# Altium PCB PCB1.PcbDoc (part 1 of 2)
Units mm, origin at the board's own origin, x right, y up, seen from the top; angles counter-clockwise.
Board outline 119.6 x 179.6 mm, 2 copper layers (Top Layer, Bottom Layer); 69 components, 72 nets, 360 pads, 26 vias.
Unrouted connection lines stored in the file: 3.
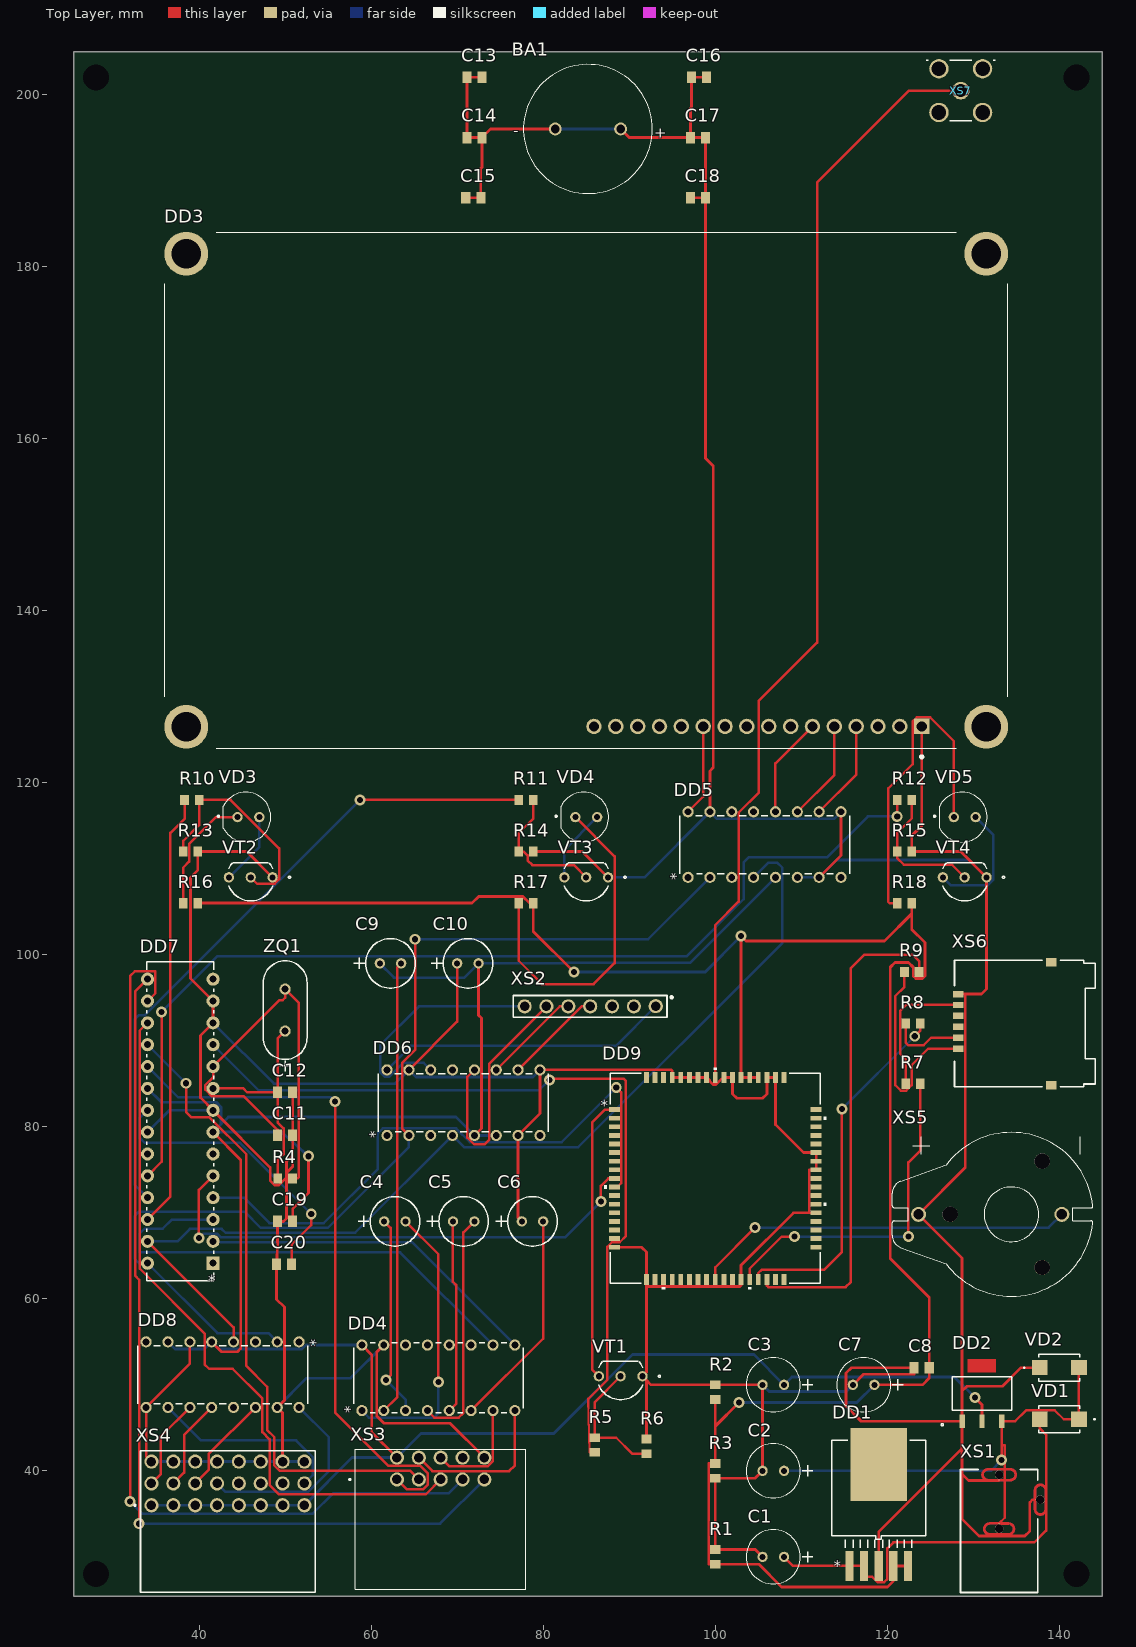
[diagram p0: Top Layer view]
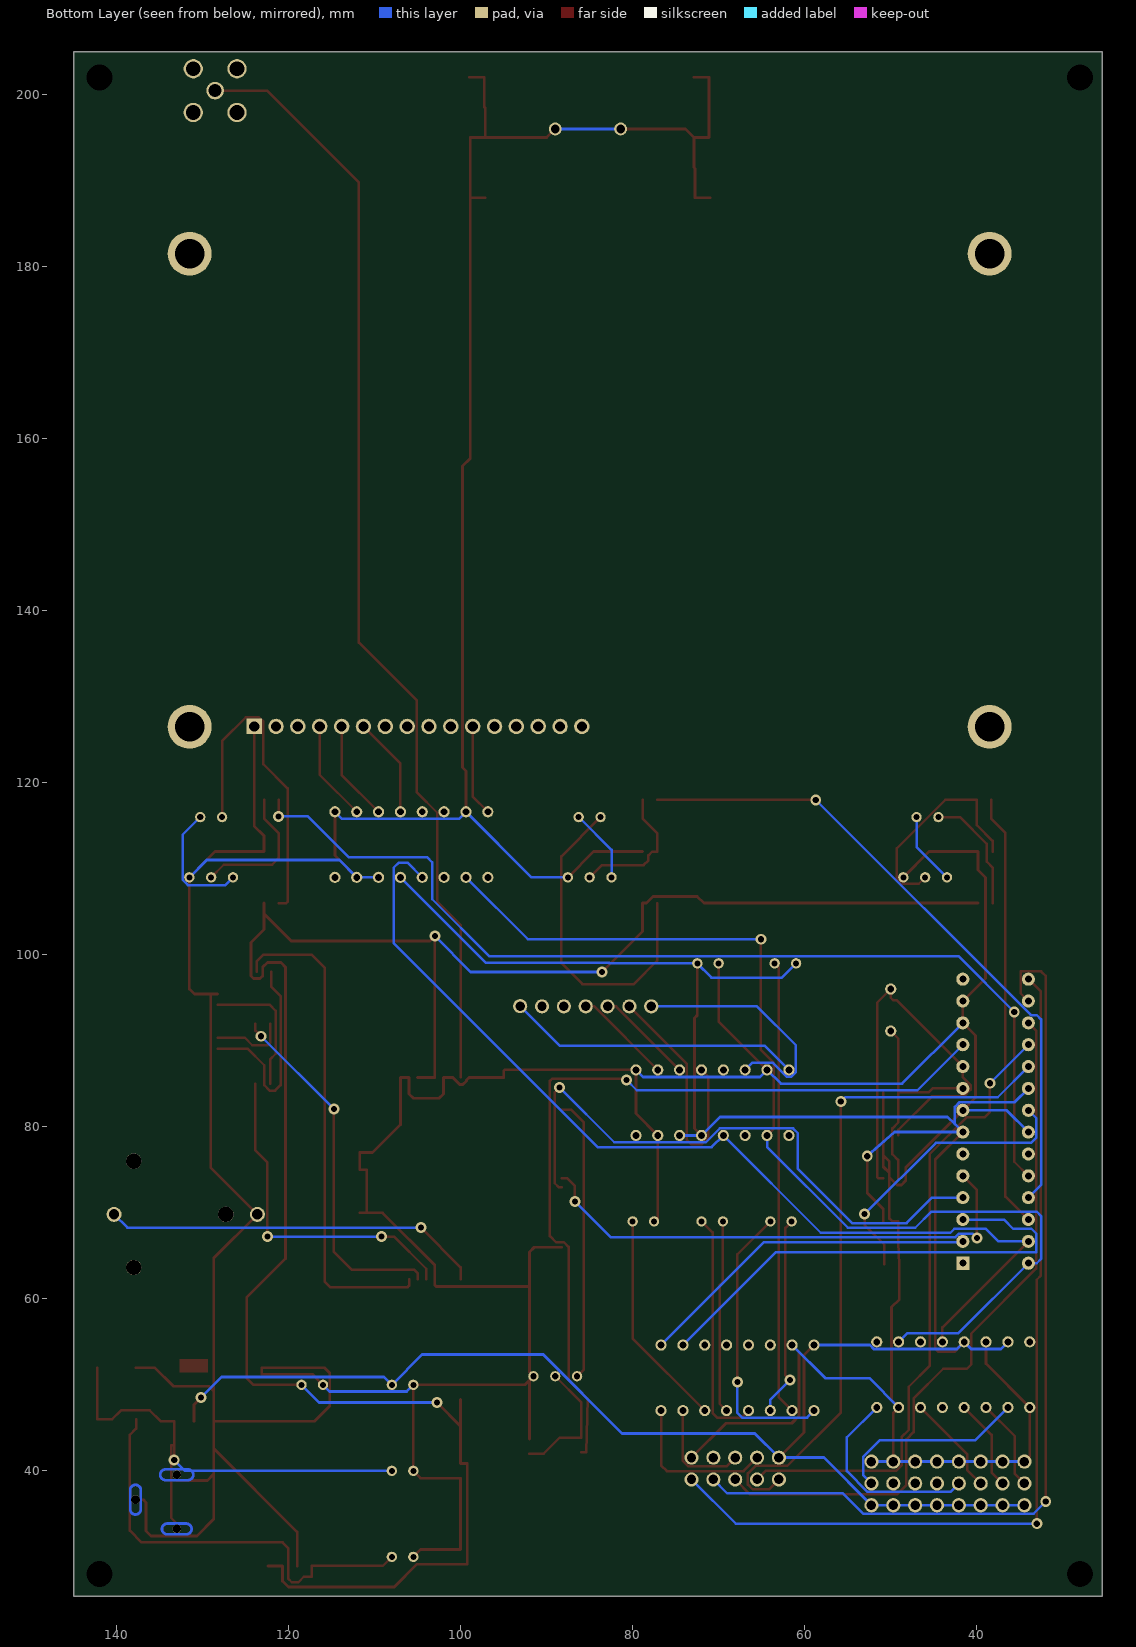
[diagram p1: Bottom Layer view, seen from below]
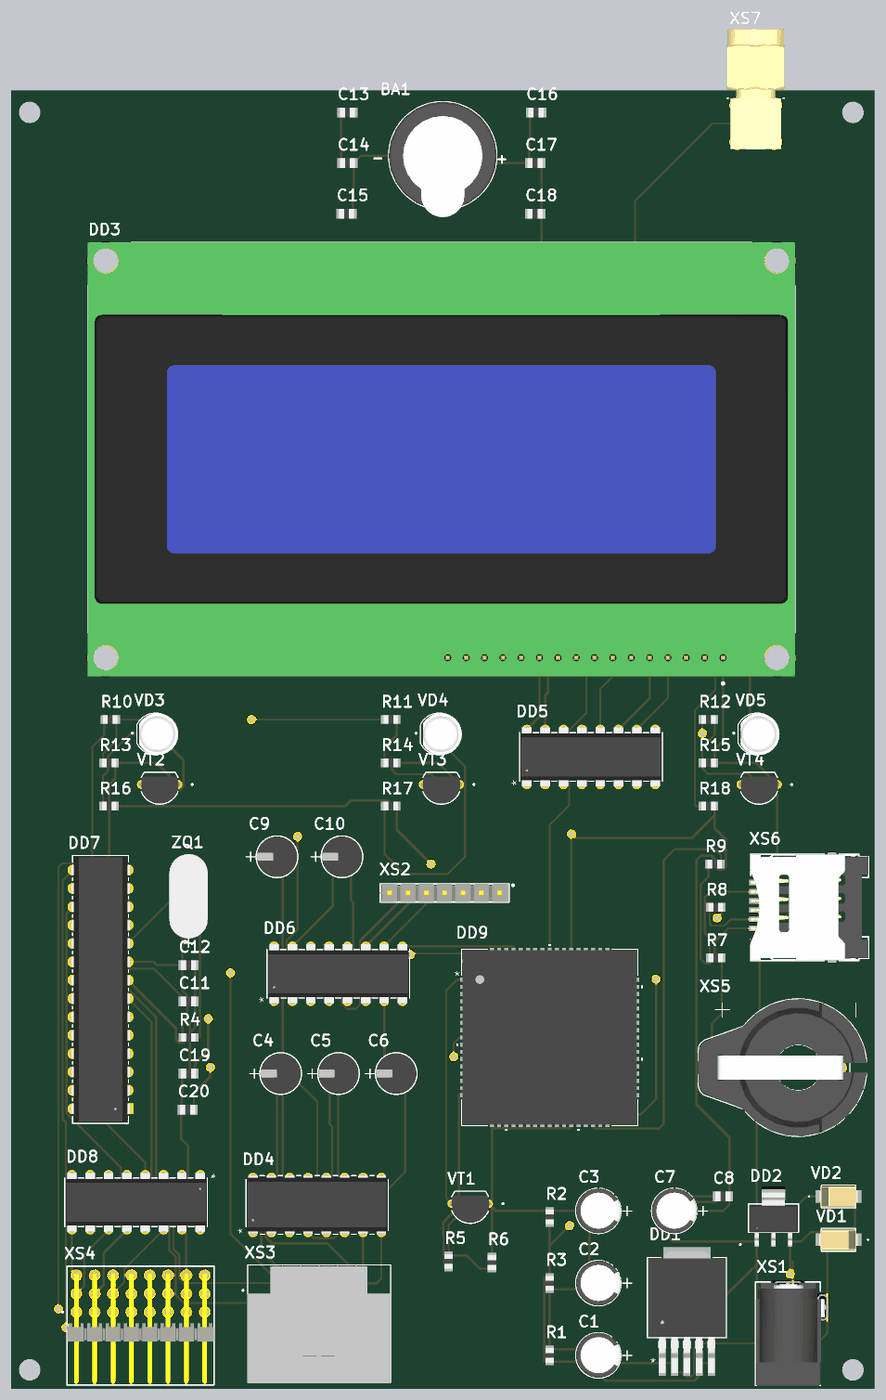
[diagram p3: 3D render of the assembled board from above, using the file's embedded part models]

## Layer stack, top to bottom
Top Solder: solder mask 0.0102, Solder Resist, Dk 3.5
Top Layer: signal copper 0.0356
Dielectric 1: dielectric 0.32, FR-4, Dk 4.8
Bottom Layer: signal copper 0.0356
Bottom Solder: solder mask 0.0102, Solder Resist, Dk 3.5

## Board outline
25.4,25.4 145,25.4 145,205 25.4,205

## Design rules (kind name [scope] priority, off if disabled: settings)
Clearance [All] p1: gap=0.254 ignorepadtopadclearanceinfootprint=FALSE except(0: Arc-SMDPad Arc-THPad Arc-Hole Track-SMDPad Track-THPad Track-Hole SMDPad-THPad SMDPad-Hole THPad-Fill THPad-Poly THPad-Region Fill-Hole Poly-Hole Region-Hole)
PolygonConnect [All] p1: connectstyle=Relief reliefconductorwidth=0.254 reliefentries=4 polygonreliefangle="90 Angle" airgapwidth=0.254
RoutingVias [All] p1: holewidth=0.711 width=1.27 viastyle="Through Hole" minholewidth=0.711 minwidth=1.27 maxholewidth=0.711 maxwidth=1.27
SolderMaskExpansion [All] p1: expansion=0.102
Width signal [InNetClass('signal')] p1: maxlimit=0.29 minlimit=0.262 preferedwidth=0.29
Width power [InNetClass('power')] p2: maxlimit=0.323 minlimit=0.29 preferedwidth=0.323
30 further rules are at their usual default settings.

## Classes and differential pairs
net class signal: NetC1_2 NetC2_2 NetC4_1 NetC4_2 NetC5_1 NetC5_2 NetC6_2 NetC9_2 NetC11_1 NetC12_1 NetC20_2 NetDD3_4 NetDD3_5 NetDD3_6 NetDD3_11 NetDD3_12 NetDD3_13 NetDD3_14 NetDD4_7 NetDD4_8 NetDD4_9 NetDD4_10 NetDD5_2 NetDD5_4 NetDD6_10 NetDD6_11 NetDD6_12 NetDD6_14 NetDD6_16 NetDD6_17 NetDD6_19 NetDD7_4 NetDD7_5 NetDD7_11 NetDD7_15 NetDD7_16 NetDD7_17 NetDD7_18 NetDD7_19 NetDD7_24 NetDD7_25 NetDD7_26 NetDD8_10 NetDD8_11 NetDD8_12 NetDD8_14 NetDD8_16 NetDD8_17 NetDD8_19 NetDD8_20 NetDD9_1 NetDD9_26 NetDD9_30 NetDD9_31 NetDD9_32 NetDD9_60 NetR5_2 NetR7_1 NetR8_1 NetR9_1 NetR10_2 NetR11_2 NetR12_2 NetR16_1 NetR17_1 NetR18_1 NetVD3_2 NetVD4_2 NetVD5_2
net class power: +5 GND VBAT
component class main: BA1 C1 C2 C3 C4 C5 C6 C7 C8 C9 C10 C11 C12 C13 C14 C15 C16 C17 C18 C19 C20 DD1 DD2 DD3 DD4 DD5 DD6 DD7 DD8 DD9 R1 R2 R3 R4 R5 R6 R7 R8 R9 R10 R11 R12 R13 R14 R15 R16 R17 R18 VD1 VD2 VD3 VD4 VD5 VT1 VT2 VT3 VT4 XS1 XS2 XS3 XS4 XS5 XS6 XS7 ZQ1

## Components (designator, comment, footprint, x,y, rotation, side; value= is the part's Value field where it differs from the comment)
BA1 "speaker_CVS-1508" SPeaKeR_CVS-1508 85.2,196 r180 top
C1 "pol_10mkF" PCAP_6_3x11THRU-ELECT_NCA 105.5,30 r0 top
C2 "pol_10mkF" PCAP_6_3x11THRU-ELECT_NCA 105.5,40 r0 top
C3 "pol_10mkF" PCAP_6_3x11THRU-ELECT_NCA 105.5,50 r0 top
C4 "pol_1mkF" PCAP_5x11-THRU-ELECT_NCA 61.511,69 r0 top
C5 "pol_1mkF" PCAP_5x11-THRU-ELECT_NCA 69.511,69 r0 top
C6 "pol_1mkF" PCAP_5x11-THRU-ELECT_NCA 77.511,69 r0 top
C7 "pol_10mkF" PCAP_6_3x11THRU-ELECT_NCA 116,50 r0 top
C8 "cap_100nF" CAP_0805_GRM 124,52 r0 top
C9 "pol_1mkF" PCAP_5x11-THRU-ELECT_NCA 61,99 r0 top
C10 "pol_1mkF" PCAP_5x11-THRU-ELECT_NCA 70,99 r0 top
C11 "33pF" CAP_0805_GRM 50,79 r0 top
C12 "33pF" CAP_0805_GRM 50,84 r0 top
C13 "cap_33pF" CAP_0805_GRM 72,202 r0 top
C14 "cap_33pF" CAP_0805_GRM 72,195 r0 top
C15 "cap_33pF" CAP_0805_GRM 71.874,188 r0 top
C16 "cap_33pF" CAP_0805_GRM 98.126,202 r0 top
C17 "cap_33pF" CAP_0805_GRM 98,195 r0 top
C18 "cap_33pF" CAP_0805_GRM 98,188 r0 top
C19 "33pF" CAP_0805_GRM 50,69 r0 top
C20 "33pF" CAP_0805_GRM 49.874,64 r0 top
DD1 "stu_MIC29302WT" TO-263-5_MCH 119,38 r0 top
DD2 "NCP1117ST50T3G" SOT223-3_ONS 131,49 r0 top
DD3 "LCD-20X4B" LCD_LCD-20X4B 85,154 r180 top
DD4 "MAX232CSE+" max232_dip16 58.92,47 r90 top
DD5 "PCF8574DGVR" SOT38-4_NXP 96.84,109 r90 top
DD6 "PCF8574DGVR" SOT38-4_NXP 61.84,79 r90 top
DD7 "ATMEGA328P-PU" 28P3_ATM 41.62,64.14 r180 top
DD8 "PCF8574DGVR" SOT38-4_NXP 51.62,55 r270 top
DD9 "SIM900A" SIM800A_SMM 100,74 r0 top
Designator1 "Comment" "BOASVIEWlayer:Top Layer:2:1:1:1" 83,2088 r0 top
Designator1 "Comment" "BOASVIEWlayer:Top Overlay:2:1:33:1" 83,2088 r0 top
Designator1 "Comment" "BOASVIEWside:Вид платы слева:2:0:0:0" 390,2447 r0 top
Designator1 "Comment" "BOASVIEWlayer:Bottom Layer:2:-1:32:1" 469,2446 r0 top
R1 "res_510" RC0805N_YAG 100,30 r270 top
R2 "res_510" RC0805N_YAG 100,49.152 r270 top
R3 "res_510" RC0805N_YAG 100,40 r90 top
R4 "res_1M" RC0805N_YAG 50,74 r0 top
R5 "res_4.7k" RC0805N_YAG 86,43 r90 top
R6 "res_4.7k" RC0805N_YAG 92,42.848 r90 top
R7 "res_4.7k" RC0805N_YAG 123,85 r0 top
R8 "res_4.7k" RC0805N_YAG 123,92 r0 top
R9 "res_4.7k" RC0805N_YAG 122.848,98 r0 top
R10 "res_4.7k" RC0805N_YAG 39.152,118 r0 top
R11 "res_4.7k" RC0805N_YAG 78,118 r0 top
R12 "res_4.7k" RC0805N_YAG 122,118 r0 top
R13 "res_4.7k" RC0805N_YAG 39,112 r0 top
R14 "res_4.7k" RC0805N_YAG 78,112 r0 top
R15 "res_4.7k" RC0805N_YAG 122,112 r0 top
R16 "res_510" RC0805N_YAG 39,106 r0 top
R17 "res_510" RC0805N_YAG 78,106 r0 top
R18 "res_510" RC0805N_YAG 122,106 r0 top
VD1 "diode_M7" M7_DO-214AC_DTC 140,46 r180 top
VD2 "diode_M7" M7_DO-214AC_DTC 140,52 r0 top
VD3 "diode_red" LED_151054RS03000 45.73,116 r0 top
VD4 "diode_yellow" LED_151054RS03000 85,116 r0 top
VD5 "diode_green" LED_151054RS03000 129,116 r0 top
VT1 "BC547A" TO-92-3_ONS 91.54,51 r180 top
VT2 "BC547A" TO-92-3_ONS 48.54,109 r180 top
VT3 "BC547A" TO-92-3_ONS 87.54,109 r180 top
VT4 "BC547A" TO-92-3_ONS 131.54,109 r180 top
XS1 "DCJ200-10" conn_DCJ200-10 133,33 r0 top
XS2 "conn_Keypad" conn_7pin_TSW-107-05-G-D 85.46,94 r180 top
XS3 "BH-10" conn_10pin_TE_5-102570-3 63,39 r0 top
XS4 "ds1013" conn_24pin_TSW-108-08-T-T 34.46,36 r0 top
XS5 "conn_Battery_CR2032" conn_BAT_BH600 134.432,69.821 r270 top
XS6 "SIM7200-6-0-18-00-X_REVA" CONN_SIM7200-6-0-18-00-X_REVA 136,92 r270 top
XS7 "antenn_RECE.20279.001E.01" conn_antenn_901-9894-RFX 128.54,200.46 r0 top
ZQ1 "HC-49S" CRYSTAL_HC49S_MTC 50,91.12 r90 top

## Footprints (in the part's own frame and the unit in brackets; to place one, negate y for a bottom-side part, rotate by r counter-clockwise, add the part's x,y. Pads: shape width x height; smd on the part's side, far side on the other; paste and mask are expansions set on the pad)
28P3_ATM [mil]
  rect 60x60 hole 32 mask+0: 1(0,0)
  round 60 hole 32 mask+0: 2(0,-100) 3(0,-200) 4(0,-300) 5(0,-400) 6(0,-500) 7(0,-600) 8(0,-700) 9(0,-800) 10(0,-900) 11(0,-1000) 12(0,-1100) 13(0,-1200) 14(0,-1300) 15(300,-1300) 16(300,-1200) 17(300,-1100) 18(300,-1000) 19(300,-900) 20(300,-800) 21(300,-700) 22(300,-600) 23(300,-500) 24(300,-400) 25(300,-300) 26(300,-200) 27(300,-100) 28(300,0)
  silkscreen extent -2,-1380 303,80, body extent -10,-1374 309,76, height 205
"BOASVIEWlayer:Bottom Layer:2:-1:32:1" [mm]
"BOASVIEWlayer:Top Layer:2:1:1:1" [mm]
"BOASVIEWlayer:Top Overlay:2:1:33:1" [mm]
"BOASVIEWside:Вид платы слева:2:0:0:0" [mm]
CAP_0805_GRM [mil]
  rect 41.78x53 smd paste+0 mask+0: 1(-34.39,0) 2(34.39,0)
  body extent -41,-26 42,27, height 53
conn_7pin_TSW-107-05-G-D [mm] "2.54mm pitch, 7 pin, terminal strip; straight, single row"
  round 1.65 hole 1.1 mask+0: 1(-7.62,-0.025) 2(-5.08,0) 3(-2.54,0) 4(0,0) 5(2.54,0) 6(5.08,0) 7(7.62,0)
  silkscreen extent -9.59,-1.25 8.93,1.25, body extent -8.89,-1.27 9.02,1.27, height 5.21
conn_10pin_TE_5-102570-3 [mm]
  round 1.65 hole 1.1: 1(0,0) 2(0,2.54) 3(2.54,0) 4(2.54,2.54) 5(5.08,0) 6(5.08,2.54) 7(7.62,0) 8(7.62,2.54) 9(10.16,0) 10(10.16,2.54)
  silkscreen extent -5.58,-12.74 14.99,3.49, body extent -4.86,-12.88 14.96,3.35, height 11.08
conn_24pin_TSW-108-08-T-T [mm]
  round 1.65 hole 1.1: 1(0,0) 2(0,2.54) 3(0,5.08) 4(2.54,0) 5(2.54,2.54) 6(2.54,5.08) 7(5.08,0) 8(5.08,2.54) 9(5.08,5.08) 10(7.62,0) 11(7.62,2.54) 12(7.62,5.08) 13(10.16,0) 14(10.16,2.54) 15(10.16,5.08) 16(12.7,0) 17(12.7,2.54) 18(12.7,5.08) 19(15.24,0) 20(15.24,2.54) 21(15.24,5.08) 22(17.78,0) 23(17.78,2.54) 24(17.78,5.08)
  silkscreen extent -2.02,-10.1 19.05,6.35, body extent -1.27,-9.94 19.05,5.37, height 7.81
conn_antenn_901-9894-RFX [mm]
  round 2.05 hole 1.5: 1(0,0)
  round 2.25 hole 1.7: 2(-2.54,2.54) 3(-2.54,-2.54) 4(2.54,-2.54) 5(2.54,2.54)
  silkscreen extent -3.99,-3.51 3.99,3.51, body extent -4,-3.5 4,13.1, height 10.98
conn_BAT_BH600 [mm]
  round 1.75 hole 1.2: 1(0,5.86) 2(0,-10.8)
  round 1.8 hole 1.8 unplated: ""(-6.179,3.567) ""(0,-7.135) ""(6.179,3.567)
  silkscreen extent -9.53,-13.84 9.53,9.48, body extent -9.52,-13.84 9.52,9.5, height 7.34
conn_DCJ200-10 [mm]
  rect 0.1x0.1 smd paste-1 mask+0: 1(0,5.95) 2(0,0.9) 3(4.2,3.65)
  round 1 hole 1: ""(0,0.25) ""(0,6.55) ""(4.8,3.65)
  Top Layer region: 0,0.75 -1.1,0.75 -1.126,0.749 -1.152,0.747 -1.178,0.744 -1.204,0.739 -1.229,0.733 -1.255,0.726 -1.279,0.717 -1.303,0.707 -1.327,0.696 -1.35,0.683 -1.372,0.669 -1.394,0.655 -1.415,0.639 -1.435,0.622 -1.454,0.604 -1.472,0.585 -1.489,0.565 -1.505,0.544 -1.519,0.522 -1.533,0.5 -1.546,0.477 -1.557,0.453 -1.567,0.429 -1.576,0.405 -1.583,0.379 -1.589,0.354 -1.594,0.328 -1.597,0.302 -1.599,0.276 -1.6,0.25 -1.599,0.224 -1.597,0.198 -1.594,0.172 -1.589,0.146 -1.583,0.121 -1.576,0.095 -1.567,0.071 -1.557,0.047 -1.546,0.023 -1.533,0 -1.519,-0.022 -1.505,-0.044 -1.489,-0.065 -1.472,-0.085 -1.454,-0.104 -1.435,-0.122 -1.415,-0.139 -1.394,-0.155 -1.372,-0.169 -1.35,-0.183 -1.327,-0.196 -1.303,-0.207 -1.279,-0.217 -1.255,-0.226 -1.229,-0.233 -1.204,-0.239 -1.178,-0.244 -1.152,-0.247 -1.126,-0.249 -1.1,-0.25 0,-0.25 0,-0.5 -1.1,-0.5 -1.139,-0.499 -1.178,-0.496 -1.217,-0.491 -1.256,-0.484 -1.294,-0.474 -1.332,-0.463 -1.369,-0.45 -1.405,-0.435 -1.44,-0.418 -1.475,-0.4 -1.508,-0.379 -1.541,-0.357 -1.572,-0.333 -1.602,-0.307 -1.63,-0.28 -1.657,-0.252 -1.683,-0.222 -1.707,-0.191 -1.729,-0.158 -1.75,-0.125 -1.768,-0.09 -1.785,-0.055 -1.8,-0.019 -1.813,0.018 -1.824,0.056 -1.834,0.094 -1.841,0.133 -1.846,0.172 -1.849,0.211 -1.85,0.25 -1.849,0.289 -1.846,0.328 -1.841,0.367 -1.834,0.406 -1.824,0.444 -1.813,0.482 -1.8,0.519 -1.785,0.555 -1.768,0.59 -1.75,0.625 -1.729,0.658 -1.707,0.691 -1.683,0.722 -1.657,0.752 -1.63,0.78 -1.602,0.807 -1.572,0.833 -1.541,0.857 -1.508,0.879 -1.475,0.9 -1.44,0.918 -1.405,0.935 -1.369,0.95 -1.332,0.963 -1.294,0.974 -1.256,0.984 -1.217,0.991 -1.178,0.996 -1.139,0.999 -1.1,1 0,1
  Top Layer region: 1.139,0.999 1.178,0.996 1.217,0.991 1.256,0.984 1.294,0.974 1.332,0.963 1.369,0.95 1.405,0.935 1.44,0.918 1.475,0.9 1.508,0.879 1.541,0.857 1.572,0.833 1.602,0.807 1.63,0.78 1.657,0.752 1.683,0.722 1.707,0.691 1.729,0.658 1.75,0.625 1.768,0.59 1.785,0.555 1.8,0.519 1.813,0.482 1.824,0.444 1.834,0.406 1.841,0.367 1.846,0.328 1.849,0.289 1.85,0.25 1.849,0.211 1.846,0.172 1.841,0.133 1.834,0.094 1.824,0.056 1.813,0.018 1.8,-0.019 1.785,-0.055 1.768,-0.09 1.75,-0.125 1.729,-0.158 1.707,-0.191 1.683,-0.222 1.657,-0.252 1.63,-0.28 1.602,-0.307 1.572,-0.333 1.541,-0.357 1.508,-0.379 1.475,-0.4 1.44,-0.418 1.405,-0.435 1.369,-0.45 1.332,-0.463 1.294,-0.474 1.256,-0.484 1.217,-0.491 1.178,-0.496 1.139,-0.499 1.1,-0.5 0,-0.5 0,-0.25 1.1,-0.25 1.126,-0.249 1.152,-0.247 1.178,-0.244 1.204,-0.239 1.229,-0.233 1.255,-0.226 1.279,-0.217 1.303,-0.207 1.327,-0.196 1.35,-0.183 1.372,-0.169 1.394,-0.155 1.415,-0.139 1.435,-0.122 1.454,-0.104 1.472,-0.085 1.489,-0.065 1.505,-0.044 1.519,-0.022 1.533,0 1.546,0.023 1.557,0.047 1.567,0.071 1.576,0.095 1.583,0.121 1.589,0.146 1.594,0.172 1.597,0.198 1.599,0.224 1.6,0.25 1.599,0.276 1.597,0.302 1.594,0.328 1.589,0.354 1.583,0.379 1.576,0.405 1.567,0.429 1.557,0.453 1.546,0.477 1.533,0.5 1.519,0.522 1.505,0.544 1.489,0.565 1.472,0.585 1.454,0.604 1.435,0.622 1.415,0.639 1.394,0.655 1.372,0.669 1.35,0.683 1.327,0.696 1.303,0.707 1.279,0.717 1.255,0.726 1.229,0.733 1.204,0.739 1.178,0.744 1.152,0.747 1.126,0.749 1.1,0.75 0,0.75 0,1 1.1,1
  Top Layer region: 5.55,2.55 5.549,2.511 5.546,2.472 5.541,2.433 5.534,2.394 5.524,2.356 5.513,2.318 5.5,2.281 5.485,2.245 5.468,2.21 5.45,2.175 5.429,2.142 5.407,2.109 5.383,2.078 5.357,2.048 5.33,2.02 5.302,1.993 5.272,1.967 5.241,1.943 5.208,1.921 5.175,1.9 5.14,1.882 5.105,1.865 5.069,1.85 5.032,1.837 4.994,1.826 4.956,1.816 4.917,1.809 4.878,1.804 4.839,1.801 4.8,1.8 4.761,1.801 4.722,1.804 4.683,1.809 4.644,1.816 4.606,1.826 4.568,1.837 4.531,1.85 4.495,1.865 4.46,1.882 4.425,1.9 4.392,1.921 4.359,1.943 4.328,1.967 4.298,1.993 4.27,2.02 4.243,2.048 4.217,2.078 4.193,2.109 4.171,2.142 4.15,2.175 4.132,2.21 4.115,2.245 4.1,2.281 4.087,2.318 4.076,2.356 4.066,2.394 4.059,2.433 4.054,2.472 4.051,2.511 4.05,2.55 4.05,3.65 4.3,3.65 4.3,2.55 4.301,2.524 4.303,2.498 4.306,2.472 4.311,2.446 4.317,2.421 4.324,2.395 4.333,2.371 4.343,2.347 4.354,2.323 4.367,2.3 4.381,2.278 4.395,2.256 4.411,2.235 4.428,2.215 4.446,2.196 4.465,2.178 4.485,2.161 4.506,2.145 4.528,2.131 4.55,2.117 4.573,2.104 4.597,2.093 4.621,2.083 4.645,2.074 4.671,2.067 4.696,2.061 4.722,2.056 4.748,2.053 4.774,2.051 4.8,2.05 4.826,2.051 4.852,2.053 4.878,2.056 4.904,2.061 4.929,2.067 4.955,2.074 4.979,2.083 5.003,2.093 5.027,2.104 5.05,2.117 5.072,2.131 5.094,2.145 5.115,2.161 5.135,2.178 5.154,2.196 5.172,2.215 5.189,2.235 5.205,2.256 5.219,2.278 5.233,2.3 5.246,2.323 5.257,2.347 5.267,2.371 5.276,2.395 5.283,2.421 5.289,2.446 5.294,2.472 5.297,2.498 5.299,2.524 5.3,2.55 5.3,3.65 5.55,3.65
  Top Layer region: 4.839,5.499 4.878,5.496 4.917,5.491 4.956,5.484 4.994,5.474 5.032,5.463 5.069,5.45 5.105,5.435 5.14,5.418 5.175,5.4 5.208,5.379 5.241,5.357 5.272,5.333 5.302,5.307 5.33,5.28 5.357,5.252 5.383,5.222 5.407,5.191 5.429,5.158 5.45,5.125 5.468,5.09 5.485,5.055 5.5,5.019 5.513,4.982 5.524,4.944 5.534,4.906 5.541,4.867 5.546,4.828 5.549,4.789 5.55,4.75 5.55,3.65 5.3,3.65 5.3,4.75 5.299,4.776 5.297,4.802 5.294,4.828 5.289,4.854 5.283,4.879 5.276,4.905 5.267,4.929 5.257,4.953 5.246,4.977 5.233,5 5.219,5.022 5.205,5.044 5.189,5.065 5.172,5.085 5.154,5.104 5.135,5.122 5.115,5.139 5.094,5.155 5.072,5.169 5.05,5.183 5.027,5.196 5.003,5.207 4.979,5.217 4.955,5.226 4.929,5.233 4.904,5.239 4.878,5.244 4.852,5.247 4.826,5.249 4.8,5.25 4.774,5.249 4.748,5.247 4.722,5.244 4.696,5.239 4.671,5.233 4.645,5.226 4.621,5.217 4.597,5.207 4.573,5.196 4.55,5.183 4.528,5.169 4.506,5.155 4.485,5.139 4.465,5.122 4.446,5.104 4.428,5.085 4.411,5.065 4.395,5.044 4.381,5.022 4.367,5 4.354,4.977 4.343,4.953 4.333,4.929 4.324,4.905 4.317,4.879 4.311,4.854 4.306,4.828 4.303,4.802 4.301,4.776 4.3,4.75 4.3,3.65 4.05,3.65 4.05,4.75 4.051,4.789 4.054,4.828 4.059,4.867 4.066,4.906 4.076,4.944 4.087,4.982 4.1,5.019 4.115,5.055 4.132,5.09 4.15,5.125 4.171,5.158 4.193,5.191 4.217,5.222 4.243,5.252 4.27,5.28 4.298,5.307 4.328,5.333 4.359,5.357 4.392,5.379 4.425,5.4 4.46,5.418 4.495,5.435 4.531,5.45 4.568,5.463 4.606,5.474 4.644,5.484 4.683,5.491 4.722,5.496 4.761,5.499 4.8,5.5
  Top Layer region: 0,7.05 -1.3,7.05 -1.326,7.049 -1.352,7.047 -1.378,7.044 -1.404,7.039 -1.429,7.033 -1.455,7.026 -1.479,7.017 -1.503,7.007 -1.527,6.996 -1.55,6.983 -1.572,6.969 -1.594,6.955 -1.615,6.939 -1.635,6.922 -1.654,6.904 -1.672,6.885 -1.689,6.865 -1.705,6.844 -1.719,6.822 -1.733,6.8 -1.746,6.777 -1.757,6.753 -1.767,6.729 -1.776,6.705 -1.783,6.679 -1.789,6.654 -1.794,6.628 -1.797,6.602 -1.799,6.576 -1.8,6.55 -1.799,6.524 -1.797,6.498 -1.794,6.472 -1.789,6.446 -1.783,6.421 -1.776,6.395 -1.767,6.371 -1.757,6.347 -1.746,6.323 -1.733,6.3 -1.719,6.278 -1.705,6.256 -1.689,6.235 -1.672,6.215 -1.654,6.196 -1.635,6.178 -1.615,6.161 -1.594,6.145 -1.572,6.131 -1.55,6.117 -1.527,6.104 -1.503,6.093 -1.479,6.083 -1.455,6.074 -1.429,6.067 -1.404,6.061 -1.378,6.056 -1.352,6.053 -1.326,6.051 -1.3,6.05 0,6.05 0,5.8 -1.3,5.8 -1.339,5.801 -1.378,5.804 -1.417,5.809 -1.456,5.816 -1.494,5.826 -1.532,5.837 -1.569,5.85 -1.605,5.865 -1.64,5.882 -1.675,5.9 -1.708,5.921 -1.741,5.943 -1.772,5.967 -1.802,5.993 -1.83,6.02 -1.857,6.048 -1.883,6.078 -1.907,6.109 -1.929,6.142 -1.95,6.175 -1.968,6.21 -1.985,6.245 -2,6.281 -2.013,6.318 -2.024,6.356 -2.034,6.394 -2.041,6.433 -2.046,6.472 -2.049,6.511 -2.05,6.55 -2.049,6.589 -2.046,6.628 -2.041,6.667 -2.034,6.706 -2.024,6.744 -2.013,6.782 -2,6.819 -1.985,6.855 -1.968,6.89 -1.95,6.925 -1.929,6.958 -1.907,6.991 -1.883,7.022 -1.857,7.052 -1.83,7.08 -1.802,7.107 -1.772,7.133 -1.741,7.157 -1.708,7.179 -1.675,7.2 -1.64,7.218 -1.605,7.235 -1.569,7.25 -1.532,7.263 -1.494,7.274 -1.456,7.284 -1.417,7.291 -1.378,7.296 -1.339,7.299 -1.3,7.3 0,7.3
  Top Layer region: 1.339,7.299 1.378,7.296 1.417,7.291 1.456,7.284 1.494,7.274 1.532,7.263 1.569,7.25 1.605,7.235 1.64,7.218 1.675,7.2 1.708,7.179 1.741,7.157 1.772,7.133 1.802,7.107 1.83,7.08 1.857,7.052 1.883,7.022 1.907,6.991 1.929,6.958 1.95,6.925 1.968,6.89 1.985,6.855 2,6.819 2.013,6.782 2.024,6.744 2.034,6.706 2.041,6.667 2.046,6.628 2.049,6.589 2.05,6.55 2.049,6.511 2.046,6.472 2.041,6.433 2.034,6.394 2.024,6.356 2.013,6.318 2,6.281 1.985,6.245 1.968,6.21 1.95,6.175 1.929,6.142 1.907,6.109 1.883,6.078 1.857,6.048 1.83,6.02 1.802,5.993 1.772,5.967 1.741,5.943 1.708,5.921 1.675,5.9 1.64,5.882 1.605,5.865 1.569,5.85 1.532,5.837 1.494,5.826 1.456,5.816 1.417,5.809 1.378,5.804 1.339,5.801 1.3,5.8 0,5.8 0,6.05 1.3,6.05 1.326,6.051 1.352,6.053 1.378,6.056 1.404,6.061 1.429,6.067 1.455,6.074 1.479,6.083 1.503,6.093 1.527,6.104 1.55,6.117 1.572,6.131 1.594,6.145 1.615,6.161 1.635,6.178 1.654,6.196 1.672,6.215 1.689,6.235 1.705,6.256 1.719,6.278 1.733,6.3 1.746,6.323 1.757,6.347 1.767,6.371 1.776,6.395 1.783,6.421 1.789,6.446 1.794,6.472 1.797,6.498 1.799,6.524 1.8,6.55 1.799,6.576 1.797,6.602 1.794,6.628 1.789,6.654 1.783,6.679 1.776,6.705 1.767,6.729 1.757,6.753 1.746,6.777 1.733,6.8 1.719,6.822 1.705,6.844 1.689,6.865 1.672,6.885 1.654,6.904 1.635,6.922 1.615,6.939 1.594,6.955 1.572,6.969 1.55,6.983 1.527,6.996 1.503,7.007 1.479,7.017 1.455,7.026 1.429,7.033 1.404,7.039 1.378,7.044 1.352,7.047 1.326,7.049 1.3,7.05 0,7.05 0,7.3 1.3,7.3
  Bottom Layer region: 0,0.75 -1.1,0.75 -1.126,0.749 -1.152,0.747 -1.178,0.744 -1.204,0.739 -1.229,0.733 -1.255,0.726 -1.279,0.717 -1.303,0.707 -1.327,0.696 -1.35,0.683 -1.372,0.669 -1.394,0.655 -1.415,0.639 -1.435,0.622 -1.454,0.604 -1.472,0.585 -1.489,0.565 -1.505,0.544 -1.519,0.522 -1.533,0.5 -1.546,0.477 -1.557,0.453 -1.567,0.429 -1.576,0.405 -1.583,0.379 -1.589,0.354 -1.594,0.328 -1.597,0.302 -1.599,0.276 -1.6,0.25 -1.599,0.224 -1.597,0.198 -1.594,0.172 -1.589,0.146 -1.583,0.121 -1.576,0.095 -1.567,0.071 -1.557,0.047 -1.546,0.023 -1.533,0 -1.519,-0.022 -1.505,-0.044 -1.489,-0.065 -1.472,-0.085 -1.454,-0.104 -1.435,-0.122 -1.415,-0.139 -1.394,-0.155 -1.372,-0.169 -1.35,-0.183 -1.327,-0.196 -1.303,-0.207 -1.279,-0.217 -1.255,-0.226 -1.229,-0.233 -1.204,-0.239 -1.178,-0.244 -1.152,-0.247 -1.126,-0.249 -1.1,-0.25 0,-0.25 0,-0.5 -1.1,-0.5 -1.139,-0.499 -1.178,-0.496 -1.217,-0.491 -1.256,-0.484 -1.294,-0.474 -1.332,-0.463 -1.369,-0.45 -1.405,-0.435 -1.44,-0.418 -1.475,-0.4 -1.508,-0.379 -1.541,-0.357 -1.572,-0.333 -1.602,-0.307 -1.63,-0.28 -1.657,-0.252 -1.683,-0.222 -1.707,-0.191 -1.729,-0.158 -1.75,-0.125 -1.768,-0.09 -1.785,-0.055 -1.8,-0.019 -1.813,0.018 -1.824,0.056 -1.834,0.094 -1.841,0.133 -1.846,0.172 -1.849,0.211 -1.85,0.25 -1.849,0.289 -1.846,0.328 -1.841,0.367 -1.834,0.406 -1.824,0.444 -1.813,0.482 -1.8,0.519 -1.785,0.555 -1.768,0.59 -1.75,0.625 -1.729,0.658 -1.707,0.691 -1.683,0.722 -1.657,0.752 -1.63,0.78 -1.602,0.807 -1.572,0.833 -1.541,0.857 -1.508,0.879 -1.475,0.9 -1.44,0.918 -1.405,0.935 -1.369,0.95 -1.332,0.963 -1.294,0.974 -1.256,0.984 -1.217,0.991 -1.178,0.996 -1.139,0.999 -1.1,1 0,1
  Bottom Layer region: 1.139,0.999 1.178,0.996 1.217,0.991 1.256,0.984 1.294,0.974 1.332,0.963 1.369,0.95 1.405,0.935 1.44,0.918 1.475,0.9 1.508,0.879 1.541,0.857 1.572,0.833 1.602,0.807 1.63,0.78 1.657,0.752 1.683,0.722 1.707,0.691 1.729,0.658 1.75,0.625 1.768,0.59 1.785,0.555 1.8,0.519 1.813,0.482 1.824,0.444 1.834,0.406 1.841,0.367 1.846,0.328 1.849,0.289 1.85,0.25 1.849,0.211 1.846,0.172 1.841,0.133 1.834,0.094 1.824,0.056 1.813,0.018 1.8,-0.019 1.785,-0.055 1.768,-0.09 1.75,-0.125 1.729,-0.158 1.707,-0.191 1.683,-0.222 1.657,-0.252 1.63,-0.28 1.602,-0.307 1.572,-0.333 1.541,-0.357 1.508,-0.379 1.475,-0.4 1.44,-0.418 1.405,-0.435 1.369,-0.45 1.332,-0.463 1.294,-0.474 1.256,-0.484 1.217,-0.491 1.178,-0.496 1.139,-0.499 1.1,-0.5 0,-0.5 0,-0.25 1.1,-0.25 1.126,-0.249 1.152,-0.247 1.178,-0.244 1.204,-0.239 1.229,-0.233 1.255,-0.226 1.279,-0.217 1.303,-0.207 1.327,-0.196 1.35,-0.183 1.372,-0.169 1.394,-0.155 1.415,-0.139 1.435,-0.122 1.454,-0.104 1.472,-0.085 1.489,-0.065 1.505,-0.044 1.519,-0.022 1.533,0 1.546,0.023 1.557,0.047 1.567,0.071 1.576,0.095 1.583,0.121 1.589,0.146 1.594,0.172 1.597,0.198 1.599,0.224 1.6,0.25 1.599,0.276 1.597,0.302 1.594,0.328 1.589,0.354 1.583,0.379 1.576,0.405 1.567,0.429 1.557,0.453 1.546,0.477 1.533,0.5 1.519,0.522 1.505,0.544 1.489,0.565 1.472,0.585 1.454,0.604 1.435,0.622 1.415,0.639 1.394,0.655 1.372,0.669 1.35,0.683 1.327,0.696 1.303,0.707 1.279,0.717 1.255,0.726 1.229,0.733 1.204,0.739 1.178,0.744 1.152,0.747 1.126,0.749 1.1,0.75 0,0.75 0,1 1.1,1
  Bottom Layer region: 5.55,2.55 5.549,2.511 5.546,2.472 5.541,2.433 5.534,2.394 5.524,2.356 5.513,2.318 5.5,2.281 5.485,2.245 5.468,2.21 5.45,2.175 5.429,2.142 5.407,2.109 5.383,2.078 5.357,2.048 5.33,2.02 5.302,1.993 5.272,1.967 5.241,1.943 5.208,1.921 5.175,1.9 5.14,1.882 5.105,1.865 5.069,1.85 5.032,1.837 4.994,1.826 4.956,1.816 4.917,1.809 4.878,1.804 4.839,1.801 4.8,1.8 4.761,1.801 4.722,1.804 4.683,1.809 4.644,1.816 4.606,1.826 4.568,1.837 4.531,1.85 4.495,1.865 4.46,1.882 4.425,1.9 4.392,1.921 4.359,1.943 4.328,1.967 4.298,1.993 4.27,2.02 4.243,2.048 4.217,2.078 4.193,2.109 4.171,2.142 4.15,2.175 4.132,2.21 4.115,2.245 4.1,2.281 4.087,2.318 4.076,2.356 4.066,2.394 4.059,2.433 4.054,2.472 4.051,2.511 4.05,2.55 4.05,3.65 4.3,3.65 4.3,2.55 4.301,2.524 4.303,2.498 4.306,2.472 4.311,2.446 4.317,2.421 4.324,2.395 4.333,2.371 4.343,2.347 4.354,2.323 4.367,2.3 4.381,2.278 4.395,2.256 4.411,2.235 4.428,2.215 4.446,2.196 4.465,2.178 4.485,2.161 4.506,2.145 4.528,2.131 4.55,2.117 4.573,2.104 4.597,2.093 4.621,2.083 4.645,2.074 4.671,2.067 4.696,2.061 4.722,2.056 4.748,2.053 4.774,2.051 4.8,2.05 4.826,2.051 4.852,2.053 4.878,2.056 4.904,2.061 4.929,2.067 4.955,2.074 4.979,2.083 5.003,2.093 5.027,2.104 5.05,2.117 5.072,2.131 5.094,2.145 5.115,2.161 5.135,2.178 5.154,2.196 5.172,2.215 5.189,2.235 5.205,2.256 5.219,2.278 5.233,2.3 5.246,2.323 5.257,2.347 5.267,2.371 5.276,2.395 5.283,2.421 5.289,2.446 5.294,2.472 5.297,2.498 5.299,2.524 5.3,2.55 5.3,3.65 5.55,3.65
  Bottom Layer region: 4.839,5.499 4.878,5.496 4.917,5.491 4.956,5.484 4.994,5.474 5.032,5.463 5.069,5.45 5.105,5.435 5.14,5.418 5.175,5.4 5.208,5.379 5.241,5.357 5.272,5.333 5.302,5.307 5.33,5.28 5.357,5.252 5.383,5.222 5.407,5.191 5.429,5.158 5.45,5.125 5.468,5.09 5.485,5.055 5.5,5.019 5.513,4.982 5.524,4.944 5.534,4.906 5.541,4.867 5.546,4.828 5.549,4.789 5.55,4.75 5.55,3.65 5.3,3.65 5.3,4.75 5.299,4.776 5.297,4.802 5.294,4.828 5.289,4.854 5.283,4.879 5.276,4.905 5.267,4.929 5.257,4.953 5.246,4.977 5.233,5 5.219,5.022 5.205,5.044 5.189,5.065 5.172,5.085 5.154,5.104 5.135,5.122 5.115,5.139 5.094,5.155 5.072,5.169 5.05,5.183 5.027,5.196 5.003,5.207 4.979,5.217 4.955,5.226 4.929,5.233 4.904,5.239 4.878,5.244 4.852,5.247 4.826,5.249 4.8,5.25 4.774,5.249 4.748,5.247 4.722,5.244 4.696,5.239 4.671,5.233 4.645,5.226 4.621,5.217 4.597,5.207 4.573,5.196 4.55,5.183 4.528,5.169 4.506,5.155 4.485,5.139 4.465,5.122 4.446,5.104 4.428,5.085 4.411,5.065 4.395,5.044 4.381,5.022 4.367,5 4.354,4.977 4.343,4.953 4.333,4.929 4.324,4.905 4.317,4.879 4.311,4.854 4.306,4.828 4.303,4.802 4.301,4.776 4.3,4.75 4.3,3.65 4.05,3.65 4.05,4.75 4.051,4.789 4.054,4.828 4.059,4.867 4.066,4.906 4.076,4.944 4.087,4.982 4.1,5.019 4.115,5.055 4.132,5.09 4.15,5.125 4.171,5.158 4.193,5.191 4.217,5.222 4.243,5.252 4.27,5.28 4.298,5.307 4.328,5.333 4.359,5.357 4.392,5.379 4.425,5.4 4.46,5.418 4.495,5.435 4.531,5.45 4.568,5.463 4.606,5.474 4.644,5.484 4.683,5.491 4.722,5.496 4.761,5.499 4.8,5.5
  Bottom Layer region: 0,7.05 -1.3,7.05 -1.326,7.049 -1.352,7.047 -1.378,7.044 -1.404,7.039 -1.429,7.033 -1.455,7.026 -1.479,7.017 -1.503,7.007 -1.527,6.996 -1.55,6.983 -1.572,6.969 -1.594,6.955 -1.615,6.939 -1.635,6.922 -1.654,6.904 -1.672,6.885 -1.689,6.865 -1.705,6.844 -1.719,6.822 -1.733,6.8 -1.746,6.777 -1.757,6.753 -1.767,6.729 -1.776,6.705 -1.783,6.679 -1.789,6.654 -1.794,6.628 -1.797,6.602 -1.799,6.576 -1.8,6.55 -1.799,6.524 -1.797,6.498 -1.794,6.472 -1.789,6.446 -1.783,6.421 -1.776,6.395 -1.767,6.371 -1.757,6.347 -1.746,6.323 -1.733,6.3 -1.719,6.278 -1.705,6.256 -1.689,6.235 -1.672,6.215 -1.654,6.196 -1.635,6.178 -1.615,6.161 -1.594,6.145 -1.572,6.131 -1.55,6.117 -1.527,6.104 -1.503,6.093 -1.479,6.083 -1.455,6.074 -1.429,6.067 -1.404,6.061 -1.378,6.056 -1.352,6.053 -1.326,6.051 -1.3,6.05 0,6.05 0,5.8 -1.3,5.8 -1.339,5.801 -1.378,5.804 -1.417,5.809 -1.456,5.816 -1.494,5.826 -1.532,5.837 -1.569,5.85 -1.605,5.865 -1.64,5.882 -1.675,5.9 -1.708,5.921 -1.741,5.943 -1.772,5.967 -1.802,5.993 -1.83,6.02 -1.857,6.048 -1.883,6.078 -1.907,6.109 -1.929,6.142 -1.95,6.175 -1.968,6.21 -1.985,6.245 -2,6.281 -2.013,6.318 -2.024,6.356 -2.034,6.394 -2.041,6.433 -2.046,6.472 -2.049,6.511 -2.05,6.55 -2.049,6.589 -2.046,6.628 -2.041,6.667 -2.034,6.706 -2.024,6.744 -2.013,6.782 -2,6.819 -1.985,6.855 -1.968,6.89 -1.95,6.925 -1.929,6.958 -1.907,6.991 -1.883,7.022 -1.857,7.052 -1.83,7.08 -1.802,7.107 -1.772,7.133 -1.741,7.157 -1.708,7.179 -1.675,7.2 -1.64,7.218 -1.605,7.235 -1.569,7.25 -1.532,7.263 -1.494,7.274 -1.456,7.284 -1.417,7.291 -1.378,7.296 -1.339,7.299 -1.3,7.3 0,7.3
  Bottom Layer region: 1.339,7.299 1.378,7.296 1.417,7.291 1.456,7.284 1.494,7.274 1.532,7.263 1.569,7.25 1.605,7.235 1.64,7.218 1.675,7.2 1.708,7.179 1.741,7.157 1.772,7.133 1.802,7.107 1.83,7.08 1.857,7.052 1.883,7.022 1.907,6.991 1.929,6.958 1.95,6.925 1.968,6.89 1.985,6.855 2,6.819 2.013,6.782 2.024,6.744 2.034,6.706 2.041,6.667 2.046,6.628 2.049,6.589 2.05,6.55 2.049,6.511 2.046,6.472 2.041,6.433 2.034,6.394 2.024,6.356 2.013,6.318 2,6.281 1.985,6.245 1.968,6.21 1.95,6.175 1.929,6.142 1.907,6.109 1.883,6.078 1.857,6.048 1.83,6.02 1.802,5.993 1.772,5.967 1.741,5.943 1.708,5.921 1.675,5.9 1.64,5.882 1.605,5.865 1.569,5.85 1.532,5.837 1.494,5.826 1.456,5.816 1.417,5.809 1.378,5.804 1.339,5.801 1.3,5.8 0,5.8 0,6.05 1.3,6.05 1.326,6.051 1.352,6.053 1.378,6.056 1.404,6.061 1.429,6.067 1.455,6.074 1.479,6.083 1.503,6.093 1.527,6.104 1.55,6.117 1.572,6.131 1.594,6.145 1.615,6.161 1.635,6.178 1.654,6.196 1.672,6.215 1.689,6.235 1.705,6.256 1.719,6.278 1.733,6.3 1.746,6.323 1.757,6.347 1.767,6.371 1.776,6.395 1.783,6.421 1.789,6.446 1.794,6.472 1.797,6.498 1.799,6.524 1.8,6.55 1.799,6.576 1.797,6.602 1.794,6.628 1.789,6.654 1.783,6.679 1.776,6.705 1.767,6.729 1.757,6.753 1.746,6.777 1.733,6.8 1.719,6.822 1.705,6.844 1.689,6.865 1.672,6.885 1.654,6.904 1.635,6.922 1.615,6.939 1.594,6.955 1.572,6.969 1.55,6.983 1.527,6.996 1.503,7.007 1.479,7.017 1.455,7.026 1.429,7.033 1.404,7.039 1.378,7.044 1.352,7.047 1.326,7.049 1.3,7.05 0,7.05 0,7.3 1.3,7.3
  silkscreen extent -4.5,-7.15 4.5,7.15, body extent -4.44,-7.28 5.1,7.02, height 11
CONN_SIM7200-6-0-18-00-X_REVA [mm]
  rect 0.75x1.25 smd: 1(-2.16,-7.75) 2(0.38,-7.75) 3(2.92,-7.75) 4(-3.43,-7.75) 5(-0.89,-7.75) 6(1.65,-7.75)
  rect 1x1.2 smd: ""(-7.15,3.075) ""(7.15,3.075)
  silkscreen extent -7.35,-8.18 7.35,8.18, body extent -7.36,-8.24 7.34,8.11, height 1.74
CRYSTAL_HC49S_MTC [mm]
  round 1.3 hole 0.8 mask+0: 1(0,0) 2(4.88,0)
  silkscreen extent -4.68,-2.55 8.17,2.55, body extent -3.43,-2.67 8.26,2.67, height 3.99
LCD_LCD-20X4B [mm]
  rect 1.8x1.8 hole 1.2: 1(-39,27.46)
  round 1.8 hole 1.2: 2(-36.46,27.46) 3(-33.92,27.46) 4(-31.38,27.46) 5(-28.84,27.46) 6(-26.3,27.46) 7(-23.76,27.46) 8(-21.22,27.46) 9(-18.68,27.46) 10(-16.14,27.46) 11(-13.6,27.46) 12(-11.06,27.46) 13(-8.52,27.46) 14(-5.98,27.46) 15(-3.44,27.46) 16(-0.9,27.46)
  round 5.1 hole 3.4: S1(-46.5,27.5) S2(46.5,27.5) S3(-46.5,-27.5) S4(46.5,-27.5)
  silkscreen extent -49,-30 49,31.15, body extent -49,-30 49,30, height 13.54
LED_151054RS03000 [mm]
  round 1.2 hole 0.7: 1(-1.27,0) 2(1.27,0)
  silkscreen extent -3.6,-2.9 2.6,2.9, body extent -2.56,-2.93 2.85,2.87, height 15.1
M7_DO-214AC_DTC [mm]
  rect 1.849x1.752 smd paste+0 mask+0: 1(-2.27,0) 2(2.27,0)
  silkscreen extent -4.16,-1.57 2.37,1.57, body extent -2.64,-1.4 2.64,1.4, height 2.34
max232_dip16 [mm]
  round 1.3 hole 0.8 mask+0: 1(0,0) 2(0,-2.54) 3(0,-5.08) 4(0,-7.62) 5(0,-10.16) 6(0,-12.7) 7(0,-15.24) 8(0,-17.78) 9(7.62,-17.78) 10(7.62,-15.24) 11(7.62,-12.7) 12(7.62,-10.16) 13(7.62,-7.62) 14(7.62,-5.08) 15(7.62,-2.54) 16(7.62,0)
  silkscreen extent -0.25,-18.73 7.87,0.95, body extent -0.13,-18.61 7.86,0.83, height 4.7
PCAP_5x11-THRU-ELECT_NCA [mm]
  round 1.2 hole 0.7 mask+0: 1(0,0) 2(2.489,0)
  silkscreen extent -3.04,-2.88 4.13,2.88, body extent -1.51,-2.75 4.01,2.76, height 12.26
PCAP_6_3x11THRU-ELECT_NCA [mm]
  round 1.2 hole 0.7: 1(0,0) 2(2.5,0)
  silkscreen extent -1.9,-3.15 5.86,3.15, body extent -1.87,-3.12 4.43,3.17, height 12.5
RC0805N_YAG [mil]
  rect 39.78x47 smd paste+0 mask+0: 1(-33.39,0) 2(33.39,0)
  body extent -39,-23 39,24, height 28
SIM800A_SMM [mm]
  rect 1.291x0.56 smd paste+0 mask+0: 1(-11.732,8) 2(-11.732,7) 3(-11.732,6) 4(-11.732,5) 5(-11.732,4) 6(-11.732,3) 7(-11.732,2) 8(-11.732,1) 9(-11.732,0) 10(-11.732,-1) 11(-11.732,-2) 12(-11.732,-3) 13(-11.732,-4) 14(-11.732,-5) 15(-11.732,-6) 16(-11.732,-7) 17(-11.732,-8) 35(11.732,-8) 36(11.732,-7) 37(11.732,-6) 38(11.732,-5) 39(11.732,-4) 40(11.732,-3) 41(11.732,-2) 42(11.732,-1) 43(11.732,0) 44(11.732,1) 45(11.732,2) 46(11.732,3) 47(11.732,4) 48(11.732,5) 49(11.732,6) 50(11.732,7) 51(11.732,8)
  rect 0.56x1.291 smd paste+0 mask+0: 18(-8,-11.732) 19(-7,-11.732) 20(-6,-11.732) 21(-5,-11.732) 22(-4,-11.732) 23(-3,-11.732) 24(-2,-11.732) 25(-1,-11.732) 26(0,-11.732) 27(1,-11.732) 28(2,-11.732) 29(3,-11.732) 30(4,-11.732) 31(5,-11.732) 32(6,-11.732) 33(7,-11.732) 34(8,-11.732) 52(8,11.732) 53(7,11.732) 54(6,11.732) 55(5,11.732) 56(4,11.732) 57(3,11.732) 58(2,11.732) 59(1,11.732) 60(0,11.732) 61(-1,11.732) 62(-2,11.732) 63(-3,11.732) 64(-4,11.732) 65(-5,11.732) 66(-6,11.732) 67(-7,11.732) 68(-8,11.732)
  silkscreen extent -12.89,-12.89 12.89,12.89, body extent -12.08,-12.08 12.08,12.08, height 3.15
SOT38-4_NXP [mm]
  round 1.3 hole 0.8 mask+0: 1(0,0) 2(0,-2.54) 3(0,-5.08) 4(0,-7.62) 5(0,-10.16) 6(0,-12.7) 7(0,-15.24) 8(0,-17.78) 9(7.62,-17.78) 10(7.62,-15.24) 11(7.62,-12.7) 12(7.62,-10.16) 13(7.62,-7.62) 14(7.62,-5.08) 15(7.62,-2.54) 16(7.62,0)
  silkscreen extent 0.44,-18.77 7.18,0.99, body extent -0.25,-18.64 7.87,0.86, height 4.32
SOT223-3_ONS [mil]
  rect 24x61 smd paste+0 mask+0: 1(-90.5,-127) 2(0,-127) 3(90.5,-127)
  Top Layer region: 64,96.5 64,157.5 -64,157.5 -64,96.5
  silkscreen extent -186,-148 136,78, body extent -131,-148 132,139, height 68
SPeaKeR_CVS-1508 [mm]
  round 1.5 hole 1: 1(-3.8,0) 2(3.8,0)
  silkscreen extent -7.5,-7.5 7.5,7.5, body extent -7.5,-7.5 7.5,8.5, height 7.6
TO-92-3_ONS [mm]
  round 1.2 hole 0.7 mask+0: 1(0,0) 2(2.54,0) 3(5.08,0)
  silkscreen extent -2.1,-1.71 5.08,2.73, body extent -0.32,-1.07 5.32,2.61, height 5.8
TO-263-5_MCH [mil]
  rect 37.97x137.56 smd paste+0 mask+0: 1(-134,-356.5) 2(-67,-356.5) 3(0,-356.5) 4(67,-356.5) 5(134,-356.5)
  rect 258x333 smd paste+0 mask+0: 6(0,108)
  silkscreen extent -215,-274 215,219, body extent -210,-411 210,254, height 181